# EAGLE board Navigationmark1.1 (EAGLE 9.6.2)
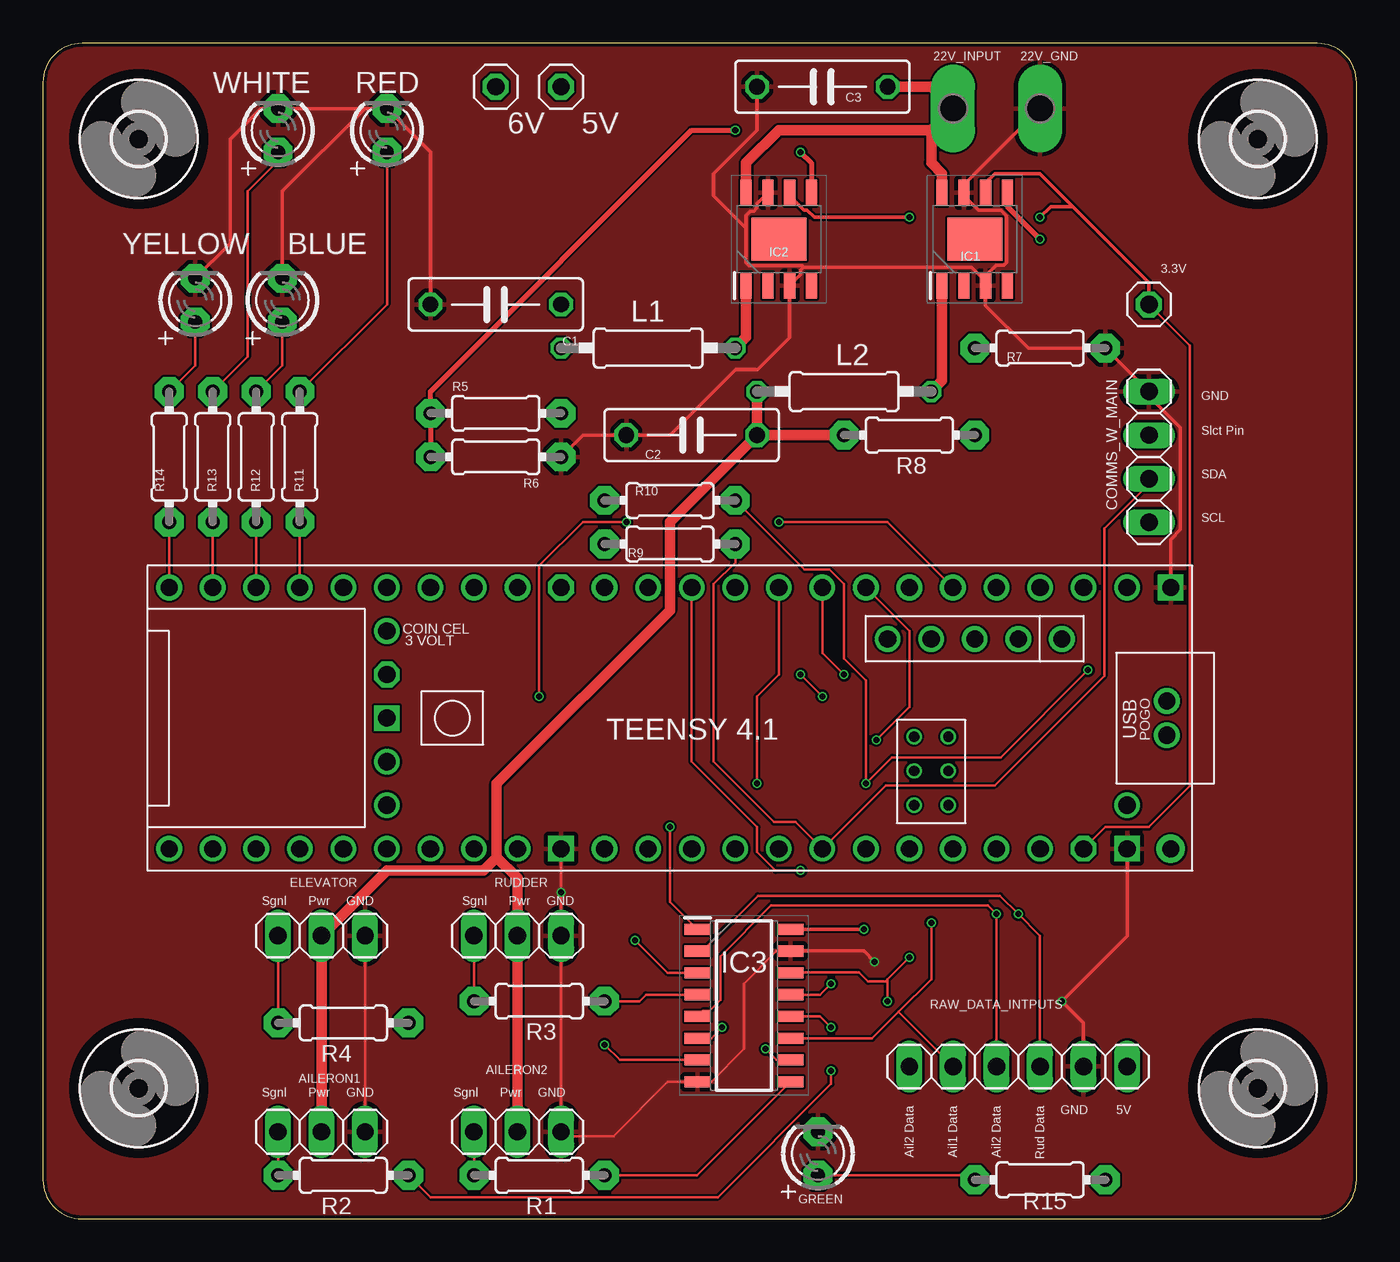
[diagram p0: board, top side]
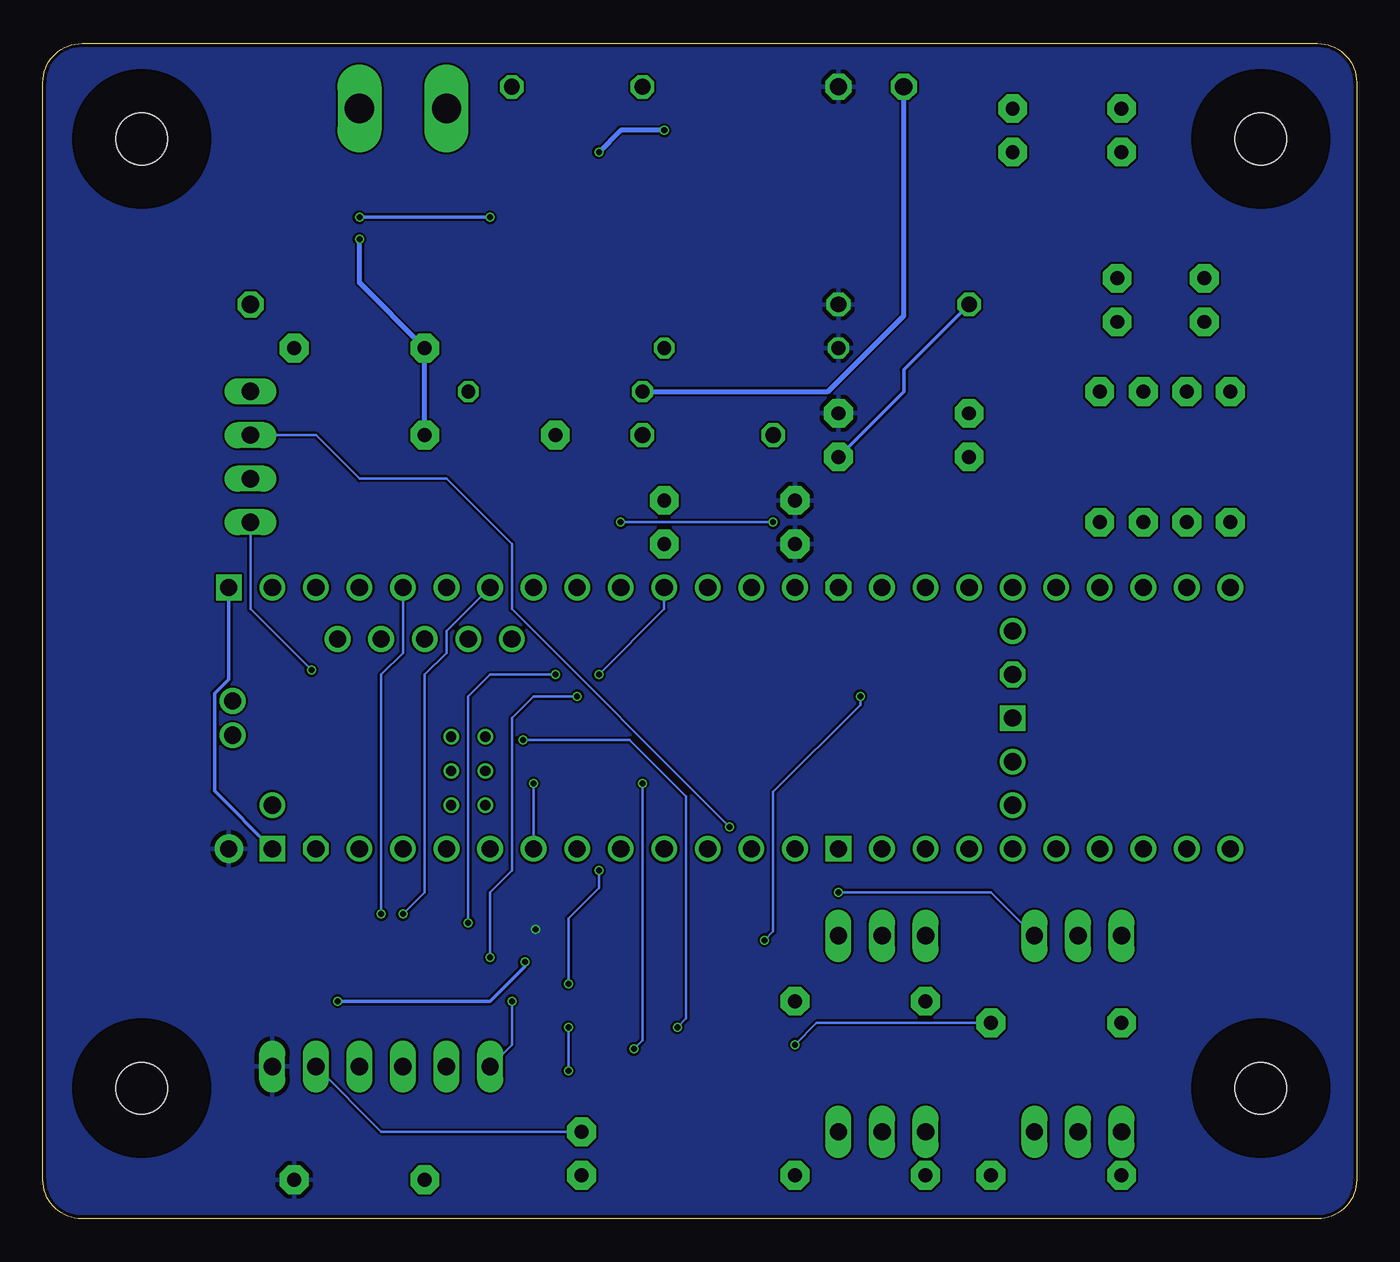
[diagram p1: board, bottom side, seen from below]

Size 76.63 x 68.57 mm. Coordinates in mm from the lower left corner, seen from the top.
Outline: 74.35,68.57 2.29,68.57 arc90 0,66.28 0,2.29 arc90 2.29,0 74.35,0 arc90 76.63,2.29 76.63,66.28 arc90 74.35,68.57
Copper layers (1*16): Top 0.035559375mm / dielectric 1.6mm / Bottom 0.035559375mm
Design rules "jlcpcb2layer": minimum track width 5mil, minimum drill 12mil, track to track 5mil, track to pad 5mil, pad to pad 5mil, via to via 5mil, smd to smd 5mil, copper to edge 8mil, drill to drill 6mil, minimum pad ring 5mil, minimum via ring 3mil, stop-mask expansion 2.5mil, vias tented up to drill 0mil, thermal gap 10mil

## Footprints (pad centres in the part's own frame; a part is rotated, then mirrored left to right if it is on the bottom)
1X01 = drill 1.016 octagon: 1 0,0
P1-17Y = drill 1.702 pad 2.121 long: TP 0,0
1X03 = drill 1.016 long: 1 -2.54,0; 2 0,0; 3 2.54,0
LED3MM = drill 0.813 pad 1.676 octagon: A -1.27,0; K 1.27,0
C075-032X103 = drill 0.914 octagon: 1 -3.81,0; 2 3.81,0
1X04 = drill 1.016 long: 1 -3.81,0; 2 -1.27,0; 3 1.27,0; 4 3.81,0
3,0 = hole 3: 0,0
SOIC127P600X170-9N = smd 1.525 x 0.65: 1 -2.712,1.905; 2 -2.712,0.635; 3 -2.712,-0.635; 4 -2.712,-1.905; 5 2.712,-1.905; 6 2.712,-0.635; 7 2.712,0.635; 8 2.712,1.905 | smd 2.51 x 3.2: 9 0,0
SOIC127P600X175-16N = smd 1.525 x 0.65: 1 -2.712,4.445; 2 -2.712,3.175; 3 -2.712,1.905; 4 -2.712,0.635; 5 -2.712,-0.635; 6 -2.712,-1.905; 7 -2.712,-3.175; 8 -2.712,-4.445; 9 2.712,-4.445; 10 2.712,-3.175; 11 2.712,-1.905; 12 2.712,-0.635; 13 2.712,0.635; 14 2.712,1.905; 15 2.712,3.175; 16 2.712,4.445
0207/10 = drill 0.813 octagon: 1 -5.08,0; 2 5.08,0
0204/7 = drill 0.813 pad 1.676 octagon: 1 -3.81,0; 2 3.81,0
1X06 = drill 1.016 long: 1 -6.35,0; 2 -3.81,0; 3 -1.27,0; 4 1.27,0; 5 3.81,0; 6 6.35,0
TEENSY41 = drill 1: 0-RX1/CS1/CRX2 -27.94,-7.62; 1-TX1/MISO1/CTX2 -25.4,-7.62; 2-OUT2 -22.86,-7.62; 3-LRCLK2 -20.32,-7.62; 4-BCLK2 -17.78,-7.62; 5-IN2 -15.24,-7.62; 6-OUT1D -12.7,-7.62; 7-RX2/OUT1A -10.16,-7.62; 8-TX2/IN1 -7.62,-7.62; 9-OUT1C -5.08,-7.62; 10-CS\MQSR -2.54,-7.62; 11-MOSI/CTX1 0,-7.62; 12-MISO/MQSL 2.54,-7.62; 13-SCK/LED 2.54,7.62; 14-A0/TX3/SPDIF_OUT 0,7.62; 15-A1/RX3/SPDIF_IN -2.54,7.62; 16-A2/RX4/SCL1 -5.08,7.62; 17-A3/TX4/SDA1 -7.62,7.62; 18-A4/SDA0 -10.16,7.62; 19-A5/SCL0 -12.7,7.62; 20-A6/TX5/LRCLK1 -15.24,7.62; 21-A7/RX5/BCLK1 -17.78,7.62; 22-A8/CTX1 -20.32,7.62; 23-A9/CRX1/MCLK1 -22.86,7.62; 24-A10/TX6/SCL2 7.62,-7.62; 25-A11/RX6/SDA2 10.16,-7.62; 26-A12/MOSI1 12.7,-7.62; 27-A13/SCK1 15.24,-7.62; 28-RX7 17.78,-7.62; 29-TX7 20.32,-7.62; 30-CRX3 22.86,-7.62; 31-CTX3 25.4,-7.62; 32-OUT1B 27.94,-7.62; 33-MCLK2 27.94,7.62; 34-RX8 25.4,7.62; 35-TX8 22.86,7.62; 36-PWM 20.32,7.62; 37-PWM 17.78,7.62; 38-A14/CS/IN1 15.24,7.62; 39-A15/CS/OUT1A 12.7,7.62; 40-A16/CS1 10.16,7.62; 41-A17/MISO1 7.62,7.62; +5V -24.13,-4.62; D+ -30.25,-1; D- -30.25,1; DM -21.59,-4.62; DP -19.05,-4.62; GND4 -16.51,-4.62; GND5 -13.97,-4.62; ON/OFF 15.24,5.08; PROGRAM 15.24,2.54; VBAT 15.24,-5.08; VUSB -27.94,5.08 | drill 1 octagon: 3V3-1 5.08,-7.62; 3V3-2 15.24,-2.54; 3V3-3 -25.4,7.62 | drill 0.6: G -15.51,3.08; LED -17.51,3.08; R+ -17.51,5.08; R- -15.51,5.08; T+ -15.51,1.08; T- -17.51,1.08 | drill 1 square: GND1 -30.48,-7.62; GND2 15.24,0; GND3 5.08,7.62; GND6 -27.94,7.62 | drill 1 pad 1.676: VIN -30.48,7.62

## Placement (x,y rotation side)
3.3V  [1X01]  64.52,53.34 270 top
5V  [1X01]  30.23,66.04 0 top
6V  [1X01]  26.42,66.04 0 top
22V_GND  TPPAD1-17Y  [P1-17Y]  58.17,64.77 180 top
22V_INPUT  TPPAD1-17Y  [P1-17Y]  53.09,64.77 0 top
AILERON1  [1X03]  16.26,5.08 0 top
AILERON2  [1X03]  27.69,5.08 0 top
BLUE  [LED3MM]  13.97,53.59 90 top
C1  470uF  [C075-032X103]  26.42,53.34 180 top
C2  470uF  [C075-032X103]  37.85,45.72 180 top
C3  10uF  [C075-032X103]  45.47,66.04 180 top
COMMS_W_MAIN  [1X04]  64.52,44.45 270 top
E$1  [3,0]  5.59,7.62 0 top
E$2  [3,0]  70.87,7.62 0 top
E$3  [3,0]  70.87,62.99 0 top
E$4  [3,0]  5.59,62.99 0 top
ELEVATOR  [1X03]  16.26,16.51 0 top
GREEN  [LED3MM]  45.21,3.81 90 top
IC1  A5975D  [SOIC127P600X170-9N]  54.36,57.15 90 top
IC2  A5975D  [SOIC127P600X170-9N]  42.93,57.15 90 top
IC3  CD74AC257M96  [SOIC127P600X175-16N]  40.89,12.45 0 top
L1  27uH  [0207/10]  35.31,50.8 0 top
L2  27uH  [0207/10]  46.74,48.26 0 top
R1  220  [0204/7]  28.96,2.54 180 top
R2  220  [0204/7]  17.53,2.54 180 top
R3  220  [0204/7]  28.96,12.7 180 top
R4  220  [0204/7]  17.53,11.43 180 top
R5  1k  [0204/7]  26.42,46.99 0 top
R6  3k  [0204/7]  26.42,44.45 180 top
R7  1.5k  [0204/7]  58.17,50.8 180 top
R8  5.6k  [0204/7]  50.55,45.72 180 top
R9  4.7k  [0204/7]  36.58,39.37 180 top
R10  4.7k  [0204/7]  36.58,41.91 0 top
R11  150  [0204/7]  14.99,44.45 90 top
R12  80  [0204/7]  12.45,44.45 90 top
R13  90  [0204/7]  9.91,44.45 90 top
R14  150  [0204/7]  7.37,44.45 90 top
R15  150  [0204/7]  58.17,2.29 180 top
RAW_DATA_INTPUTS  [1X06]  56.9,8.89 0 top
RED  [LED3MM]  20.07,63.5 90 top
RUDDER  [1X03]  27.69,16.51 0 top
U$1  TEENSY41  [TEENSY41]  35.31,29.21 180 top
WHITE  [LED3MM]  13.72,63.5 90 top
YELLOW  [LED3MM]  8.89,53.59 90 top

## Library data of the parts
3.3V 5V 6V AILERON1 AILERON2 COMMS_W_MAIN ELEVATOR RAW_DATA_INTPUTS RUDDER = pinhead
22V_GND 22V_INPUT = testpad
BLUE C1-C3 GREEN R1-R15 RED WHITE YELLOW = adafruit
E$1-E$4 = holes
IC1 IC2 = A5975D; ARROW_PART_NUMBER: A5975D; ARROW_PRICE-STOCK: https://www.arrow.com/en/products/a5975d/stmicroelectronics; DESCRIPTION: STMICROELECTRONICS - A5975D - DC/DC Boost Regulator, Adjustable, AEC-Q100, 4V to 36V In, 1.235V to 35V/3A Out, 250 kHz, PowerSO-8; HEIGHT: 1.7mm; MANUFACTURER_NAME: STMicroelectronics; MANUFACTURER_PART_NUMBER: A5975D; MOUSER_PART_NUMBER: 511-A5975D; MOUSER_PRICE-STOCK: https://www.mouser.co.uk/ProductDetail/STMicroelectronics/A5975D?qs=LYO3r17CQdO66PebjUe%2FOA%3D%3D
IC3 = CD74AC257M96; DESCRIPTION: Quad 2-Input Non-Inverting Multiplexers with 3-State Outputs; HEIGHT: 1.75mm; MANUFACTURER_NAME: Texas Instruments; MANUFACTURER_PART_NUMBER: CD74AC257M96; MOUSER_PART_NUMBER: 595-CD74AC257M96; MOUSER_PRICE-STOCK: https://www.mouser.com/Search/Refine.aspx?Keyword=595-CD74AC257M96
L1 L2 = rcl; SPICEPREFIX: L
U$1 = teensy

## Nets
3.3V: 3.3V.1 IC1.6 IC2.6 U$1.3V3-3
5V: 5V.1 C1.1 IC3.16 L1.1 R5.2 R9.2 R10.1 R15.1 RAW_DATA_INTPUTS.6 U$1.VIN
6V: 6V.1 AILERON1.2 AILERON2.2 C2.1 ELEVATOR.2 L2.1 R8.2 RUDDER.2
22V: 22V_INPUT.TP C3.1 IC1.8 IC2.8
AILERON1_SIGNAL: IC3.12 R2.1
AILERON2_SIGNAL: IC3.9 R1.1
BLUE_LED: R12.1 U$1.30-CRX3
ELEVATOR_SIGNAL: IC3.7 R4.1
FILTERED_AILERON1: IC3.10 U$1.8-TX2/IN1
FILTERED_AILERON2: IC3.13 U$1.10-CS\MQSR
FILTERED_ELEV: IC3.6 U$1.6-OUT1D
FILTERED_RUD: IC3.3 U$1.4-BCLK2
GND: 22V_GND.TP AILERON1.3 AILERON2.3 BLUE.K C1.2 C2.2 C3.2 COMMS_W_MAIN.1 ELEVATOR.3 GREEN.K IC1.3 IC1.7 IC2.3 IC2.7 IC3.8 IC3.15 R6.1 R7.1 RAW_DATA_INTPUTS.5 RED.K RUDDER.3 U$1.GND1 U$1.GND3 U$1.GND6 WHITE.K YELLOW.K
N$1: AILERON1.1 R2.2
N$2: GREEN.A R15.2
N$4: AILERON2.1 R1.2
N$7: R3.2 RUDDER.1
N$8: IC1.1 L2.2
N$9: R11.2 RED.A
N$10: ELEVATOR.1 R4.2
N$11: IC2.1 L1.2
N$12: IC2.5 R5.1 R6.2
N$14: IC1.5 R7.2 R8.1
N$15: BLUE.A R12.2
N$16: R13.2 WHITE.A
N$17: R14.2 YELLOW.A
RAW_AILERON1_DATA: IC3.11 RAW_DATA_INTPUTS.2 U$1.7-RX2/OUT1A
RAW_AILERON2_DATA: IC3.14 RAW_DATA_INTPUTS.1 U$1.9-OUT1C
RAW_ELEV_DATA: IC3.5 RAW_DATA_INTPUTS.3 U$1.5-IN2
RAW_RUD_DATA: IC3.2 RAW_DATA_INTPUTS.4 U$1.3-LRCLK2
RED_LED: R11.1 U$1.29-TX7
RUDDER_SIGNAL: IC3.4 R3.1
SCL: COMMS_W_MAIN.4 R10.2 U$1.19-A5/SCL0
SDA: COMMS_W_MAIN.3 R9.1 U$1.18-A4/SDA0
SELECT_PIN: COMMS_W_MAIN.2 IC3.1
WHITE_LED: R13.1 U$1.31-CTX3
YELLOW_LED: R14.1 U$1.32-OUT1B

## Tracks (layer width: path | path; a pad name or v marks a point on that pad's centre or on a via)
3.3V  (via drill 0.35)
  Top 0.152: 3.3V.1 66.9,50.95 66.9,25.25 64.52,22.86 61.98,22.86 U$1.3V3-3
  Top 0.203: IC1.6 54.99,60.43 55.52,60.96 58.17,60.96 60.07,59.06 | 3.3V.1 64.52,54.61 60.07,59.06 | v50.55,58.42 45,58.42 44.58,58.84 44.4,58.84 43.56,59.69 IC2.6 | v58.17,58.42 58.8,59.06 60.07,59.06
  Bottom 0.203: v50.55,58.42 v58.17,58.42
5V  (via drill 0.35)
  Top 0.203: v47.88,16.89 IC3.16
  pour Bottom: 74.17,68.58 2.29,68.58 arc90 0,66.29 0,2.29 arc90 2.29,0 74.17,0 arc90 76.45,2.29 76.45,66.29 arc90
6V
  Top 0.61: L2.1 C2.1 | C2.1 R8.2 | AILERON1.2 ELEVATOR.2 20.07,20.32 25.71,20.32 26.48,21.09 | AILERON2.2 RUDDER.2 27.69,19.88 26.48,21.09 | 26.48,21.09 26.48,25.4 36.58,35.5 36.58,40.64 C2.1
  Bottom 0.305: L2.1 30.84,48.26 26.42,52.68 6V.1
22V
  Top 0.61: IC2.8 41.02,61.59 42.93,63.5 51.82,63.5 | C3.1 51.82,66.04 22V_INPUT.TP 51.82,63.5 | IC1.8 52.45,60.96 51.82,61.59 51.82,63.5
AILERON1_SIGNAL  (via drill 0.35)
  Top 0.152: R2.1 22.61,1.27 39.37,1.27 45.97,7.87 v45.97,8.64 | IC3.12 45.34,11.81 v45.97,11.18
  Bottom 0.152: v45.97,8.64 v45.97,11.18
AILERON2_SIGNAL
  Top 0.152: R1.1 38.15,2.54 IC3.9
BLUE_LED
  Top 0.152: R12.1 U$1.30-CRX3
ELEVATOR_SIGNAL  (via drill 0.35)
  Top 0.152: IC3.7 33.66,9.27 v32.77,10.16
  Bottom 0.152: R4.1 31.5,11.43 v32.77,10.16
FILTERED_AILERON1  (via drill 0.35)
  Top 0.152: U$1.8-TX2/IN1 42.93,31.75 41.66,30.48 v41.66,25.4 | v42.16,9.91 42.8,9.27 IC3.10
  Bottom 0.152: v41.66,25.4 41.66,10.41 v42.16,9.91
FILTERED_AILERON2  (via drill 0.35)
  Top 0.152: U$1.10-CS\MQSR 37.85,26.67 41.66,22.86 41.66,21.4 42.74,20.32 v44.2,20.32 | v45.97,13.72 45.34,13.08 IC3.13
  Bottom 0.152: v44.2,20.32 44.2,19.3 45.97,17.53 v45.97,13.72
FILTERED_ELEV  (via drill 0.35)
  Top 0.152: U$1.6-OUT1D 50.55,34.29 50.55,29.87 v48.61,27.94 | v39.62,11.18 38.99,10.54 IC3.6
  Bottom 0.152: v48.61,27.94 42.42,27.94 39.12,24.64 39.12,11.68 v39.62,11.18
FILTERED_RUD  (via drill 0.35)
  Top 0.152: U$1.4-BCLK2 49.28,40.64 v42.93,40.64 | v34.04,40.64 31.5,40.64 28.96,38.1 v28.96,30.48 | v34.54,16.26 36.45,14.35 IC3.3
  Bottom 0.152: v42.93,40.64 v34.04,40.64 | v28.96,30.48 28.96,29.97 34.04,24.89 34.04,16.76 v34.54,16.26
GND  (via drill 0.35)
  Top 0.152: 53.72,59.72 IC1.7 | ELEVATOR.3 AILERON1.3 | IC3.15 42.8,15.62 40.89,13.72 40.89,9.91 38.99,8 IC3.8 36.45,8 33.27,4.83 30.48,4.83 AILERON2.3 RUDDER.3 v30.23,19.05 U$1.GND3
  Top 0.203: IC1.7 53.72,60.33 22V_GND.TP | C3.2 41.66,63.5 39.12,60.96 39.12,59.69 41.02,57.78 | 53.72,59.72 53.72,59.69 54.56,58.84 55.88,58.84 56.21,58.51 56.21,55.79 56.06,55.64 55.63,55.64 54.99,55.01 IC1.3 | R6.1 31.5,45.72 C2.2 36.58,45.72 40.39,49.53 41.68,49.53 43.56,51.41 IC2.3 44.2,55.08 44.2,55.33 44.38,55.51 | C1.2 22.61,62.23 RED.K | RED.K 18.8,64.77 13.97,59.94 BLUE.K | RED.K WHITE.K 12.7,64.77 10.92,62.99 10.92,56.9 YELLOW.K | U$1.GND1 65.79,39.64 66.34,40.2 66.34,46.16 64.52,47.99 COMMS_W_MAIN.1 R7.1 57.47,50.8 54.99,53.28 IC1.3 | U$1.GND6 63.25,16.51 v59.44,12.7 60.71,11.43 RAW_DATA_INTPUTS.5 | IC3.15 47.88,15.62 v48.51,14.99 | 44.38,55.51 54.17,55.51 54.99,54.69 IC1.3 | 44.38,55.51 44.3,55.59 41.2,55.59 41.02,55.77 41.02,57.78 | IC2.7 41.65,59.22 41.65,58.97 41.47,58.8 41.29,58.8 41.02,58.53 41.02,57.78
  Bottom 0.152: ELEVATOR.3 21.34,19.05 v30.23,19.05 | RAW_DATA_INTPUTS.5 56.9,5.08 GREEN.K
  Bottom 0.203: C1.2 26.42,49.53 26.42,48.26 R6.1 | U$1.GND1 65.79,31.48 66.62,30.65 66.62,24.96 U$1.GND6 | v59.44,12.7 50.55,12.7 48.51,14.73 v48.51,14.99
  pour Top: 74.17,0 2.29,0 arc-90 0,2.29 0,66.29 arc-90 2.29,68.58 74.17,68.58 arc-90 76.45,66.29 76.45,2.29 arc-90
N$1
  Top 0.152: R2.2 AILERON1.1
N$2
  Top 0.152: R15.2 54.1,2.54 GREEN.A
N$4
  Top 0.152: R1.2 AILERON2.1
N$7
  Top 0.152: R3.2 RUDDER.1
N$8
  Top 0.61: IC1.1 52.45,48.89 L2.2
N$9
  Top 0.152: RED.A 20.07,53.34 R11.2
N$10
  Top 0.152: R4.2 ELEVATOR.1
N$11
  Top 0.61: IC2.1 41.02,51.44 L1.2
N$12  (via drill 0.35)
  Top 0.305: R6.2 R5.1 22.61,48.26 37.85,63.5 v40.39,63.5 | v44.2,62.23 44.83,61.59 IC2.5
  Bottom 0.305: v40.39,63.5 42.93,63.5 v44.2,62.23
N$14  (via drill 0.35)
  Top 0.305: v58.17,57.15 56.26,59.06 IC1.5
  Bottom 0.305: R8.1 R7.2 58.17,54.61 v58.17,57.15
N$15
  Top 0.152: BLUE.A 13.97,49.78 R12.2
N$16
  Top 0.152: WHITE.A 13.72,61.72 11.94,59.94 11.94,50.29 R13.2
N$17
  Top 0.152: YELLOW.A 8.89,49.78 R14.2
RAW_AILERON1_DATA  (via drill 0.35)
  Top 0.152: v46.74,31.75 45.47,33.02 U$1.7-RX2/OUT1A | v51.82,17.27 51.82,13.97 49.91,12.07 | RAW_DATA_INTPUTS.2 49.91,12.07 | 49.91,12.07 48.36,10.52 44.7,10.52 44.68,10.54 IC3.11
  Bottom 0.152: v51.82,17.27 51.82,30.48 50.55,31.75 v46.74,31.75
RAW_AILERON2_DATA  (via drill 0.35)
  Top 0.152: v45.47,30.48 v44.2,31.75 | v49.28,12.7 49.28,13.97 v50.55,15.24 49.15,13.84 48.13,13.84 47.6,14.37 43.16,14.37 43.18,14.35 IC3.14
  Bottom 0.152: v45.47,30.48 48.01,30.48 49.28,29.21 49.28,20.32 50.55,19.05 v50.55,15.24 | v44.2,31.75 40.39,35.56 U$1.9-OUT1C | RAW_DATA_INTPUTS.1 49.28,10.16 v49.28,12.7
RAW_ELEV_DATA  (via drill 0.35)
  Top 0.152: IC3.5 38.52,12.15 38.88,12.15 39.51,12.78 39.51,15.32 42.48,18.29 55.12,18.29 v55.63,17.78 RAW_DATA_INTPUTS.3
  Bottom 0.152: U$1.5-IN2 53.09,34.29 53.09,33.02 54.36,31.75 54.36,19.05 v55.63,17.78
RAW_RUD_DATA  (via drill 0.35)
  Top 0.152: IC3.2 38.48,15.62 41.71,18.85 55.83,18.85 v56.9,17.78 58.17,16.51 RAW_DATA_INTPUTS.4
  Bottom 0.152: U$1.3-LRCLK2 55.63,33.02 56.9,31.75 v56.9,17.78
RED_LED
  Top 0.152: R11.1 U$1.29-TX7
RUDDER_SIGNAL
  Top 0.152: IC3.4 35.18,13.08 34.8,12.7 R3.1
SCL  (via drill 0.35)
  Top 0.152: R10.2 44.43,37.86 45.89,37.86 46.74,37.02 46.74,32.68 48.01,31.41 v48.01,25.4 49.53,26.92 55.88,26.92 v60.96,32
  Bottom 0.152: v48.01,25.4 U$1.19-A5/SCL0 | v60.96,32 64.52,35.56 COMMS_W_MAIN.4
SDA
  Top 0.152: R9.1 40.39,38.29 39.12,37.02 39.12,26.67 42.64,23.15 43.91,23.15 U$1.18-A4/SDA0 49.17,25.3 55.52,25.3 61.91,31.68 61.91,40.27 64.52,42.88 COMMS_W_MAIN.3
SELECT_PIN  (via drill 0.35)
  Top 0.152: IC3.1 36.58,18.5 v36.58,22.86
  Bottom 0.152: COMMS_W_MAIN.2 60.71,45.72 58.17,43.18 53.09,43.18 49.28,39.37 49.28,35.56 v36.58,22.86
WHITE_LED
  Top 0.152: R13.1 U$1.31-CTX3
YELLOW_LED
  Top 0.152: R14.1 U$1.32-OUT1B

## Text on the board
tPlace: GND | Slct Pin | SDA | SCL | Sgnl | Pwr | GND | Sgnl | Pwr | GND | Sgnl | Pwr | GND | Sgnl | Pwr | GND | Ail2 Data | Ail1 Data | Ail2 Data | Rud Data | GND | 5V